# Altium PCB PCB1.PcbDoc
Units mm, origin at the board's own origin, x right, y up, seen from the top; angles counter-clockwise.
Board outline 65 x 56.5 mm, 2 copper layers (Top Layer, Bottom Layer), stack 1.534 mm thick; 29 components, 15 nets, 113 pads, 106 vias.
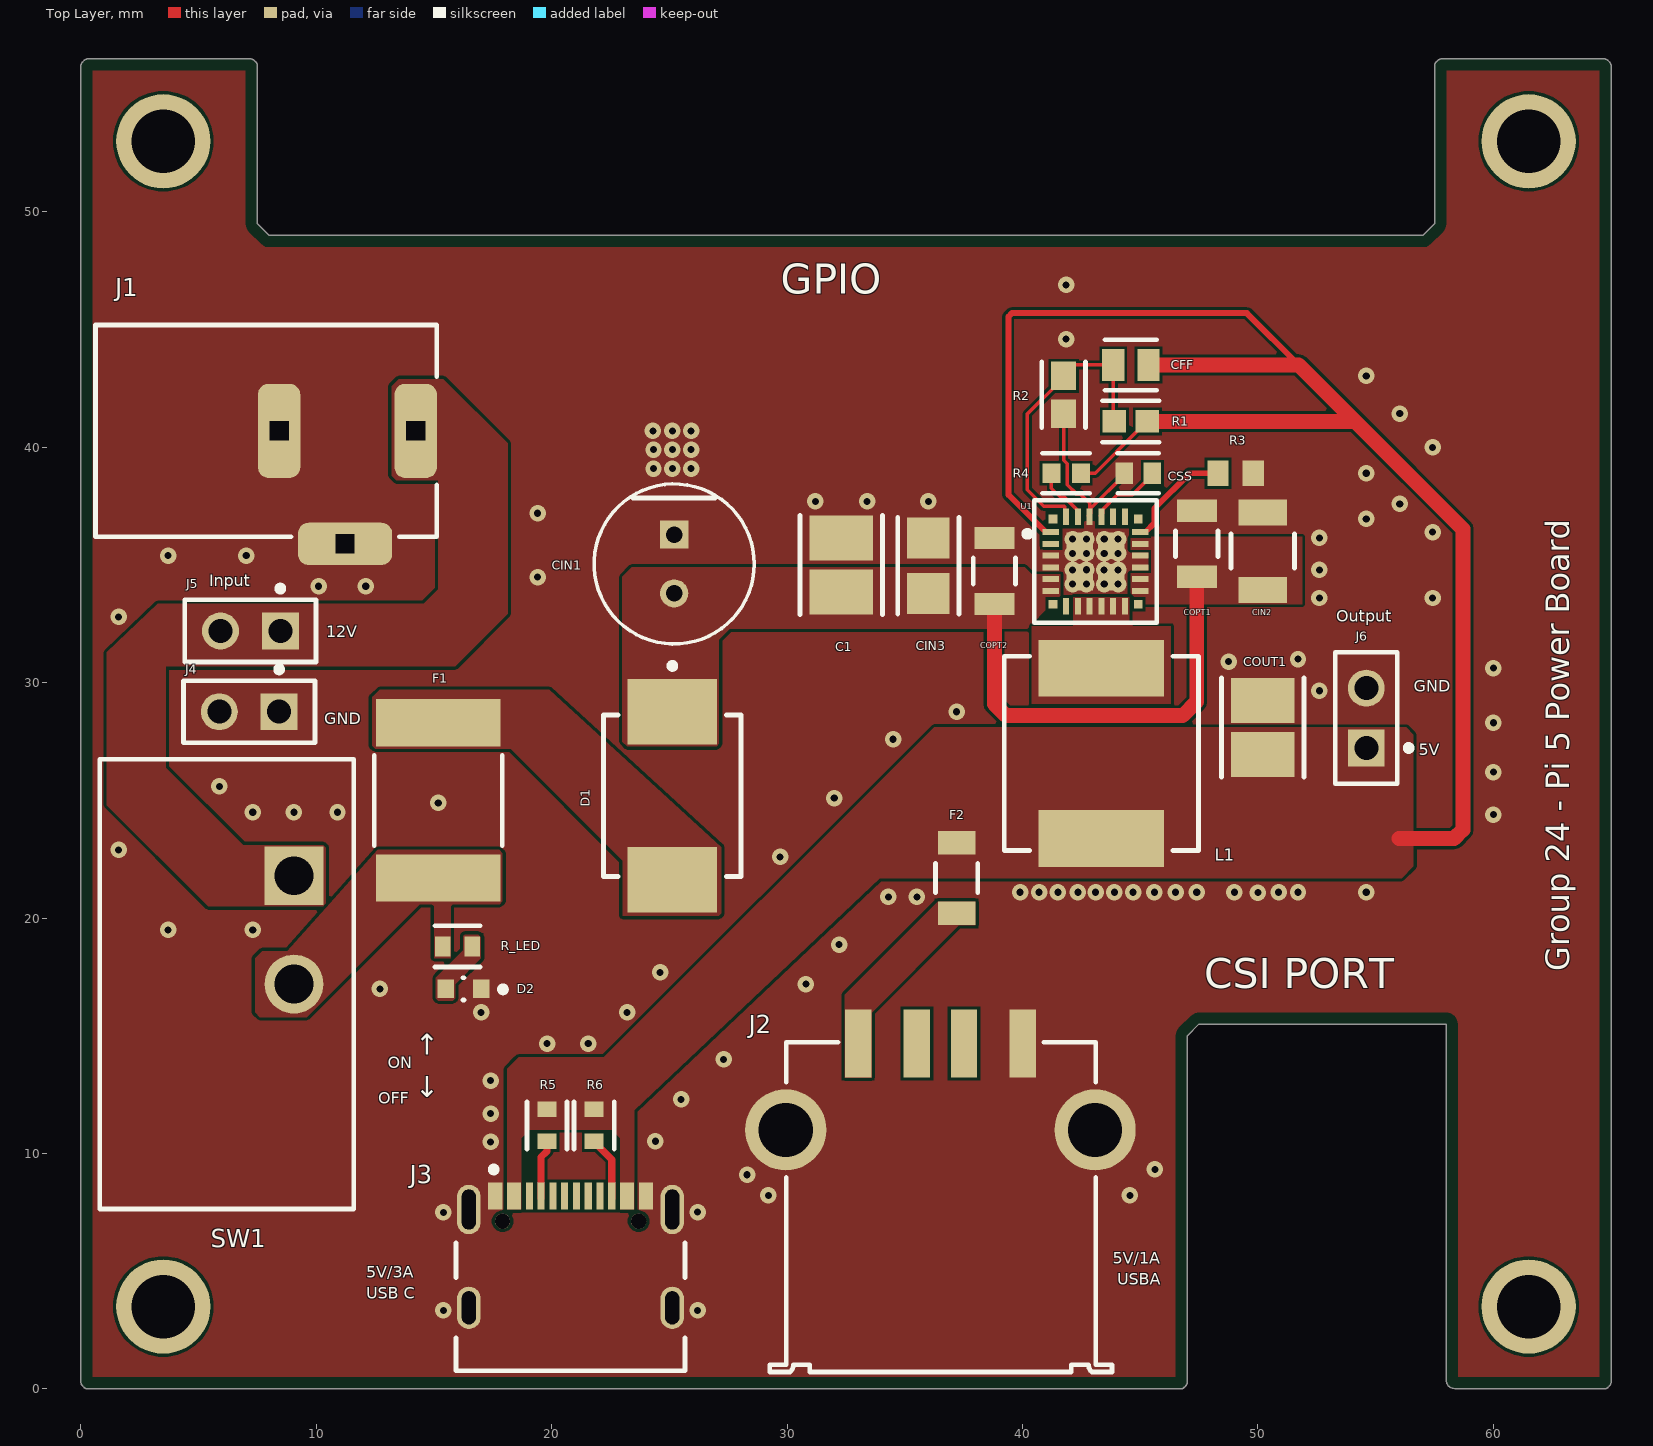
[diagram p0: Top Layer view]
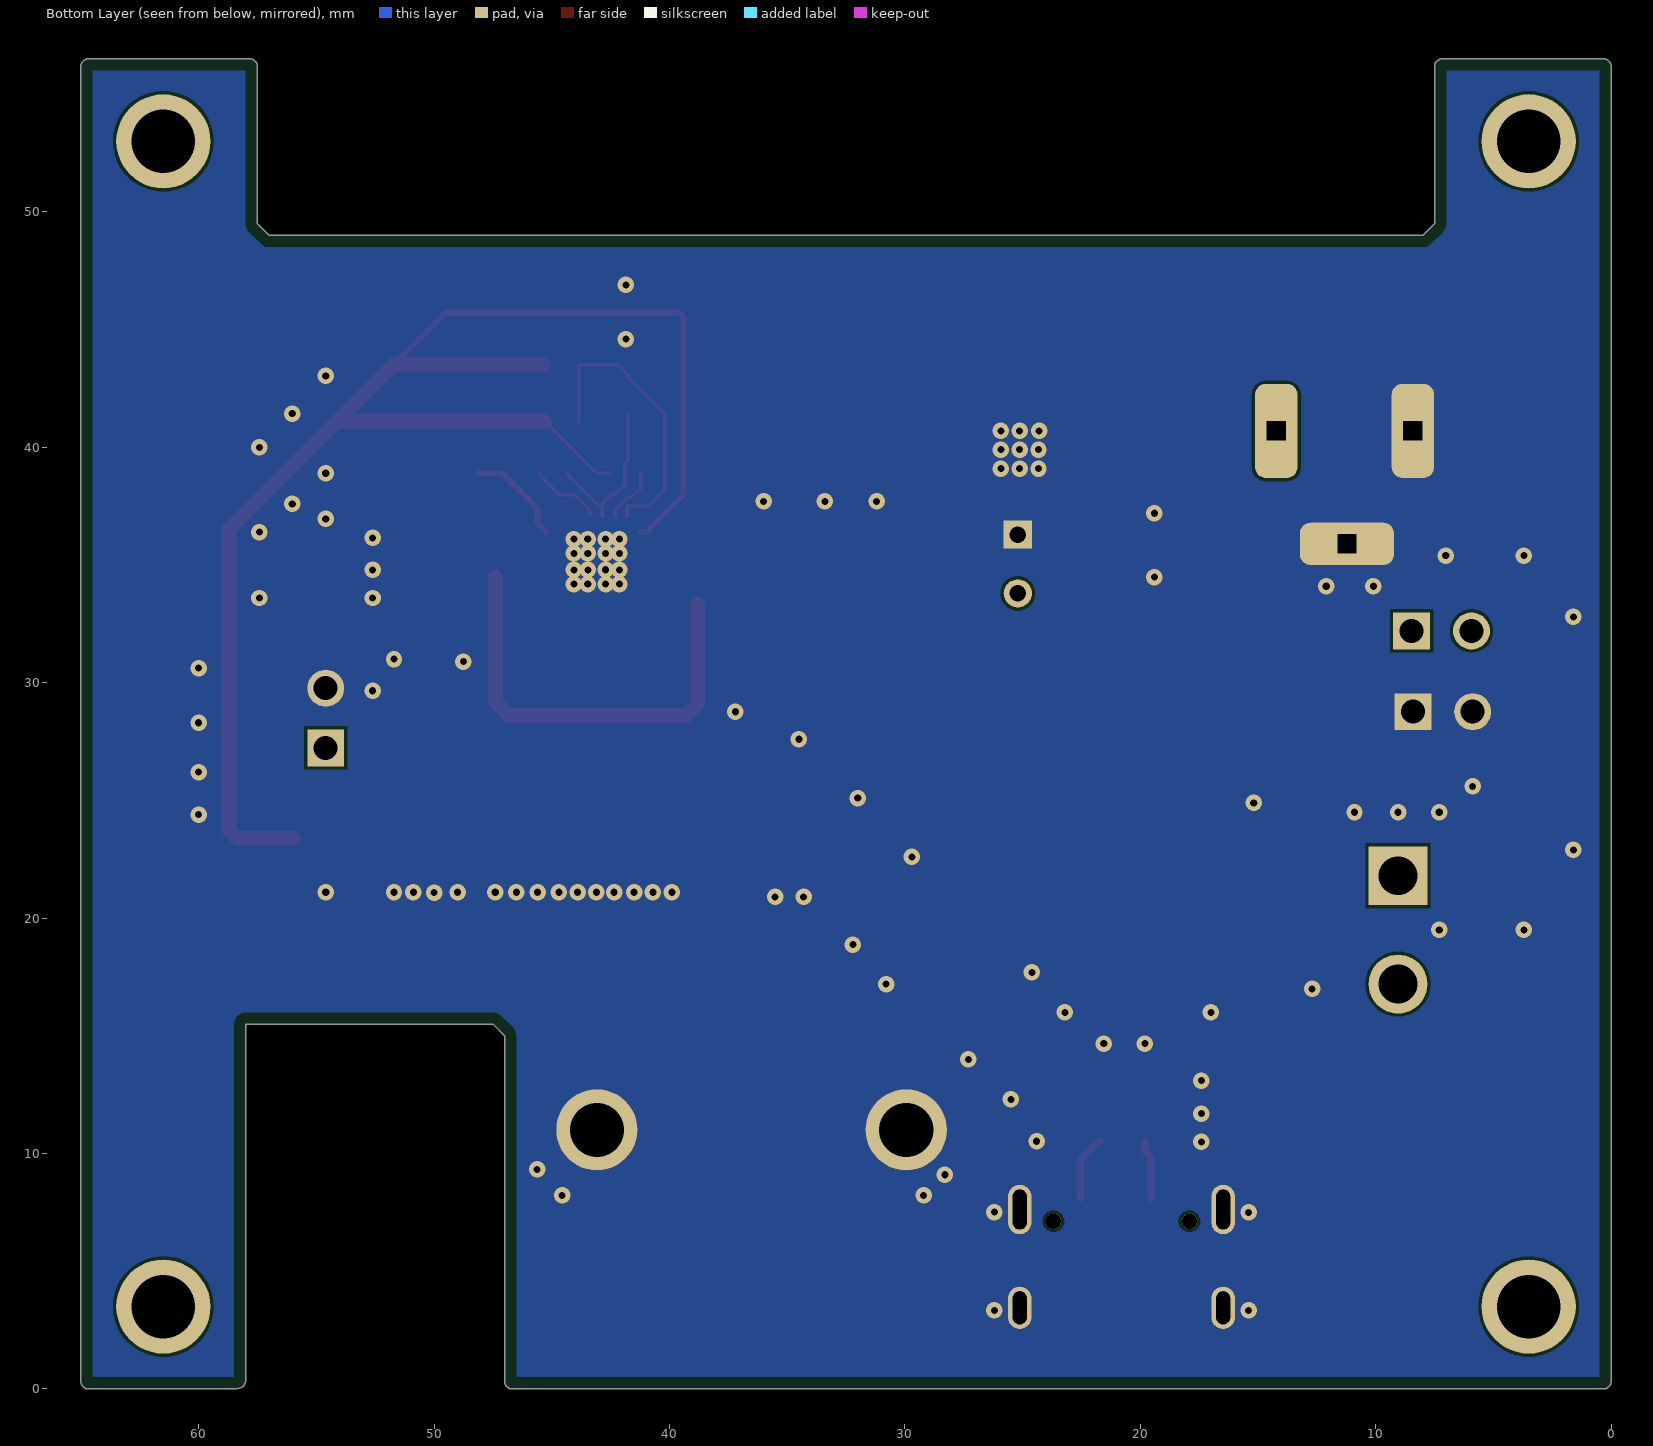
[diagram p1: Bottom Layer view, seen from below]
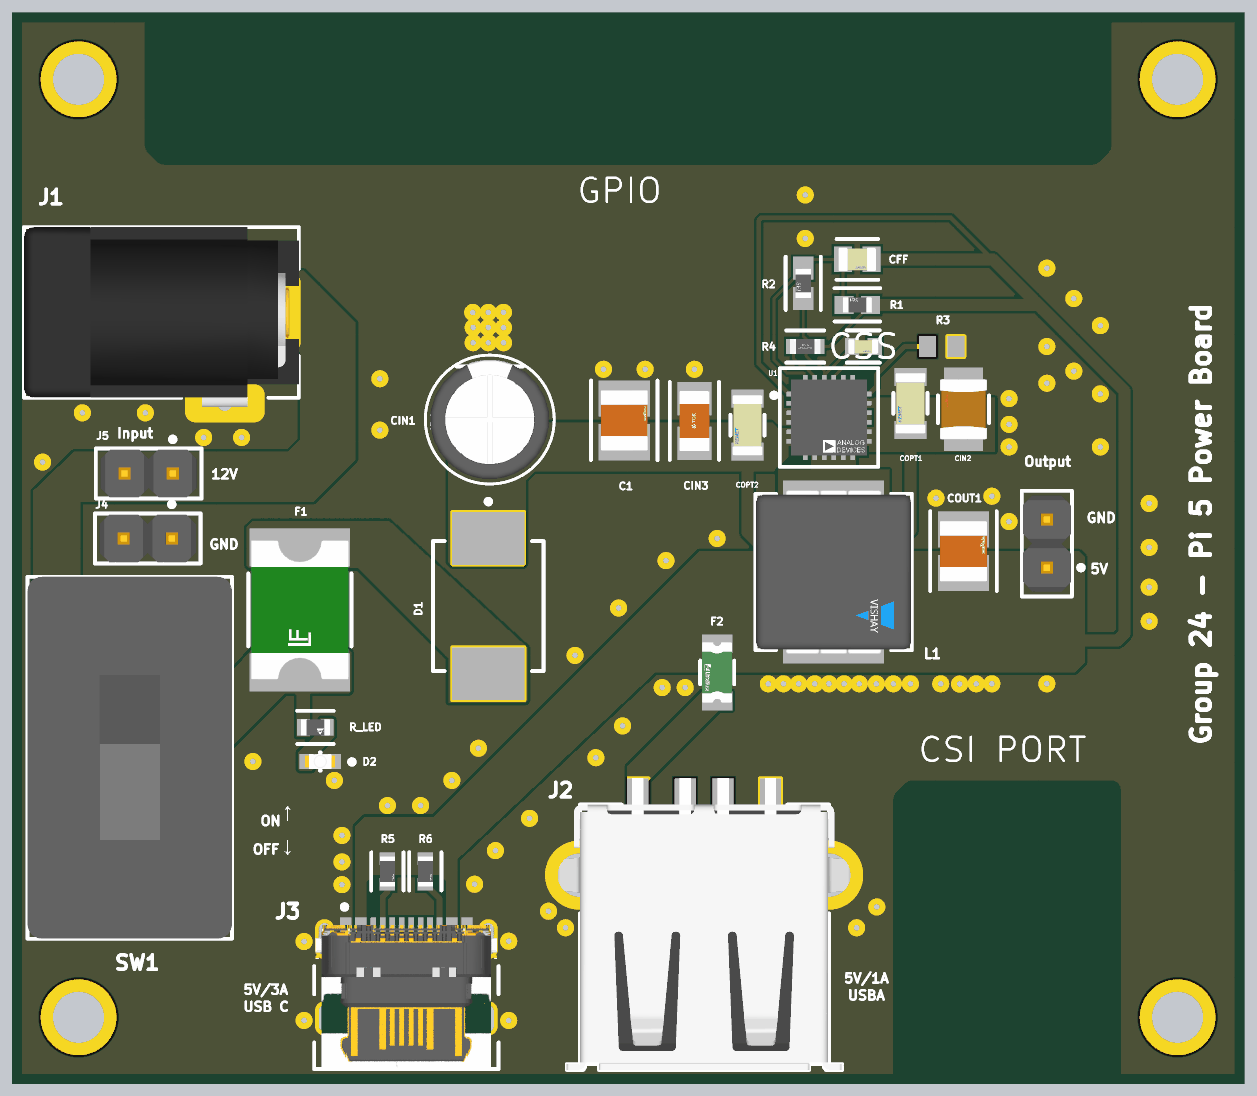
[diagram p2: 3D render of the assembled board from above, using the file's embedded part models]

## Layer stack, top to bottom
Top Solder: solder mask 0.0127, Solder Resist, Dk 3.3
Top Layer: signal copper 0.0178
Dielectric1: core 1.4986, FR-4, Dk 4.3
Bottom Layer: signal copper 0.0178
Bottom Solder: solder mask 0.0127, Solder Resist, Dk 3.3

## Board outline
58.108,0.112 cw(c58.369,0.373) 58,0.373 58,15.5 47.5,15.5 47,15 47,0.3 cw(c46.759,0.3) 46.929,0.129 46.871,0.071 cw(c46.7,0.241) 46.7,0 0.3,0 cw(c0.3,0.241) 0.129,0.071 0.071,0.129 cw(c0.241,0.3) 0,0.3 0,56.2 cw(c0.241,56.2) 0.071,56.371 0.129,56.429 cw(c0.3,56.259) 0.3,56.5 7.2,56.5 cw(c7.2,56.259) 7.371,56.429 7.429,56.371 cw(c7.259,56.2) 7.5,56.2 7.5,49.5 8,49 57,49 57.5,49.5 57.5,56.2 cw(c57.741,56.2) 57.571,56.371 57.629,56.429 cw(c57.8,56.259) 57.8,56.5 64.7,56.5 cw(c64.7,56.26) 64.871,56.429 64.929,56.371 cw(c64.759,56.2) 65,56.2 65,0.3 cw(c64.759,0.3) 64.929,0.129 64.871,0.071 cw(c64.7,0.241) 64.7,0 58.483,0 cw(c58.483,0.683)

## Design rules (kind name [scope] priority, off if disabled: settings)
BoardOutlineClearance [All] p1: gap=0.5 ignorepadtopadclearanceinfootprint=FALSE
Clearance [All] p1: gap=0.127 ignorepadtopadclearanceinfootprint=FALSE except(0.25: Text-Hole)
ComponentClearance [All] p1: gap=0.127 collisioncheckmode=3 verticalgap=0.127 showdistances=TRUE
DiffPairsRouting [All] p1: maxlimit=0.254 minlimit=0.127 mostfreqgap=0.127 toplayer_minwidth=0.127 toplayer_maxwidth=25.4 toplayer_prefwidth=0.127 bottomlayer_minwidth=0.127 bottomlayer_maxwidth=25.4 bottomlayer_prefwidth=0.127 maxuncoupledlength=12.7
Height [All] p1: minheight=0 maxheight=1816.048 prefheight=12.7
HoleSize [All] p1: absolutevalues=TRUE maxlimit=6.3 minlimit=0.3 maxpercent=80.000 minpercent=20.000
HoleToHoleClearance [All] p1: gap=0.2 allowstackedmicrovias=FALSE
MinimumAnnularRing [All] p1: minimumring=0.2
MinimumSolderMaskSliver [All] p1: minsoldermaskwidth=0
PlaneClearance [All] p1: clearance=0.127
PlaneConnect PlaneConnectPowerPads [InPadClass('PowerPads')] p1: planeconnectstyle=Direct reliefexpansion=0.508 reliefentries=4 reliefconductorwidth=0.254 reliefairgap=0.254
PlaneConnect [All] p2: pad.planeconnectstyle=Relief pad.reliefexpansion=0.3 pad.reliefentries=4 pad.reliefconductorwidth=0.127 pad.reliefairgap=0.127 via.planeconnectstyle=Direct via.reliefexpansion=0.3 via.reliefentries=4 via.reliefconductorwidth=0.127 via.reliefairgap=0.127
PolygonConnect PolygonConnectPowerPads [All vs (InPadClass('PowerPads'))] p1: connectstyle=Direct reliefconductorwidth=0.254 reliefentries=4 polygonreliefangle="90 Angle" airgapwidth=0.254
PolygonConnect [All] p2: connectstyle=Direct reliefconductorwidth=0.127 reliefentries=4 polygonreliefangle="90 Angle" airgapwidth=0.127
RoutingVias [All] p1: holewidth=0.3 width=0.6 viastyle="Through Hole" minholewidth=0.3 minwidth=0.6 maxholewidth=0.6 maxwidth=6.6
SilkToSilkClearance [All] p1: silktosilkclearance=0
SilkToSolderMaskClearance [IsPad] p1: minsilkscreentomaskgap=0.127 clearancetoexposedcopper=TRUE
SolderMaskExpansion [All] p1: expansion=0.102 istentingtop=FALSE
SupplyNets "Schematic Supply Nets" [InNet('GND')] p1: voltage=0.000
Width [All] p1: maxlimit=25.4 minlimit=0.127 preferedwidth=0.127 minimp=50.000000 maximp=50.000000 favimp=50.000000
20 further rules are at their usual default settings.

## Components (designator, comment, footprint, x,y, rotation, side; value= is the part's Value field where it differs from the comment)
C1 "4.7uF" FP-GCM32E-0_3-IPC_B 32.3,35 r90 top
CFF "10pF" FP-C0805C-DN-MFG 44.6,43.5 r180 top value="10 pF"
CIN1 "100uF" FP-RAD-TH-D_6_3_0_5-L_11-MFG 25.2,35.045 r270 top
CIN2 "10uF" FP-GRM32-MFG 50.2,35.59 r90 top
CIN3 "1uF" FP-C3216-160-0_2-IPC_B 36,34.972 r90 top
COPT1 "0.1uF" FP-C1206C-EB-MFG 47.4,35.9 r90 top value="0.10 μF"
COPT2 "0.1uF" FP-C1206C-EB-MFG 38.8,34.748 r90 top value="0.10 μF"
COUT1 "100uF" FP-GRM32E-0_3-0_2-IPC_B 50.2,28.1 r90 top
CSS "10nF" FP-C0603C-CF-MFG 44.912,38.9 r180 top value="10,000 pF"
D1 "Schottky Barrier" ONSC-SMC-2-403-03_V 25.123,25.2 r270 top
D2 "GREEN_LED" FP-APHD1608LZGCK-MFG 16.25,17 r180 top
F1 "4A hold" FP-2920L400-15MR-MFG 15.18,25 r90 top
F2 "1.1A hold" FP-NANOSMDC110F-2-MFG 37.2,21.7 r270 top value=0.07-0.2Ω
J1 "Vin_12V" 694108301002 7.87,40.7 r270 top
J2 "USB-A Connector" 62900416021 36.513,7.725 r0 top
J3 "USB-C Connector" FP-USB4105-GF-A-MFG 20.8,4.61 r0 top
J4 "M20-9990245" FP-M20-9990245-MFG 7.15,28.769 r180 top
J5 "M20-9990245" FP-M20-9990245-MFG 7.2,32.2 r180 top
J6 "M20-9990245" FP-M20-9990245-MFG 54.6,28.5 r90 top
L1 "3.3uH" FP-IHLP-3232DZ-FP_2_413x5-MFG 43.347,27 r270 top
R1 "1MΩ" FP-RMCF0603-IPC_B 44.6,41.1 r180 top
R2 "243kΩ" FP-RMCF0603-IPC_A 41.744,42.234 r270 top
R3 "41.2kΩ" RESC1608X55X30ML20T10 49.05,38.9 r180 top
R4 "100kΩ" FP-CRGP0603-IPC_C 41.85,38.9 r0 top value=100KΩ
R5 "10kΩ" FP-RC0603-0_55-IPC_C 19.8,11.2 r270 top
R6 "10kΩ" FP-RC0603-0_55-IPC_C 21.8,11.2 r270 top
R_LED "4.7kΩ" FP-MCT0603-IPC_C 16,18.8 r0 top
SW1 "Power Switch" FP-L101011MS02Q-MFG 6.2,17.2 r180 top
U1 "LT8640SIV#PBF" FP-LQFN-24-05-08-1511-MFG 43.1,35.15 r0 top

## Footprints (in the part's own frame and the unit in brackets; to place one, negate y for a bottom-side part, rotate by r counter-clockwise, add the part's x,y. Pads: shape width x height; smd on the part's side, far side on the other; paste and mask are expansions set on the pad)
62900416021 [mm] "USB 2.0 SMT Type A Horizontal"
  rect 1.12x2.88 smd: 1(-3.5,6.95) 2(-1,6.95) 3(1,6.95) 4(3.5,6.95)
  round 3.45 hole 2.3: Shell(-6.57,3.28) Shell(6.57,3.28)
  silkscreen extent -7.25,-7 7.29,7, body extent -7.81,-7 7.81,8.41, height 7.81
694108301002 [mm] "DC Power Jack Right Angled(6.4)"
  rrect50% 4x1.8 hole 0.8 square: 1(0,6.35) 2(0,0.55)
  rrect50% 1.8x4 hole 0.8 square: 3(4.8,3.35)
  silkscreen extent -4.5,-7.25 4.5,7.25, body extent -4.5,-7.25 5,7.25, height 10.75
FP-2920L400-15MR-MFG [mm]
  rect 2x5.3 smd paste+0 mask+0: 1(-3.3,0) 2(3.3,0)
  silkscreen extent -1.92,-2.72 1.93,2.72, body extent -4.4,-2.82 4.4,2.82, height 0.25
FP-APHD1608LZGCK-MFG [mm]
  rect 0.7x0.8 smd paste+0 mask+0: 1(-0.75,0) 2(0.75,0)
  silkscreen extent -1.8,-0.47 0.02,0.48, body extent -1.2,-0.58 1.2,0.58, height 0.25
FP-C0603C-CF-MFG [mm]
  rect 0.75x0.9 smd paste+0 mask+0: 1(-0.6,0) 2(0.6,0)
  silkscreen extent -0.87,-0.85 0.88,0.85, body extent -1.2,-0.6 1.2,0.6, height 0.25
FP-C0805C-DN-MFG [mm]
  rect 0.95x1.35 smd paste+0 mask+0: 1(-0.75,0) 2(0.75,0)
  silkscreen extent -1.1,-1.08 1.1,1.08, body extent -1.4,-0.85 1.4,0.85, height 0.25
FP-C1206C-EB-MFG [mm]
  rect 0.95x1.7 smd paste+0 mask+0: 1(-1.4,0) 2(1.4,0)
  silkscreen extent -0.55,-0.9 0.55,0.9, body extent -2,-1 2,1, height 0.25
FP-C3216-160-0_2-IPC_B [mm]
  rect 1.754x1.806 smd paste+0 mask+0: 1(-1.176,0) 2(1.176,0)
  silkscreen extent -2.05,-1.3 2.05,1.3, body extent -2.3,-1.15 2.3,1.15, height 0.25
FP-CRGP0603-IPC_C [mm]
  rect 0.758x0.812 smd paste+0 mask+0: 1(-0.627,0) 2(0.627,0)
  silkscreen extent -1.01,-0.85 1.01,0.85, body extent -1.11,-0.55 1.11,0.55, height 0.25
FP-GCM32E-0_3-IPC_B [mm]
  rect 1.903x2.706 smd paste+0 mask+0: 1(-1.151,0) 2(1.151,0)
  silkscreen extent -2.1,-1.75 2.1,1.75, body extent -2.35,-1.6 2.35,1.6, height 0.25
FP-GRM32-MFG [mm]
  rect 1.1x2.05 smd paste+0 mask+0: 1(-1.65,0) 2(1.65,0)
  silkscreen extent -0.73,-1.35 0.73,1.35, body extent -2.3,-1.45 2.3,1.45, height 0.25
FP-GRM32E-0_3-0_2-IPC_B [mm]
  rect 1.903x2.706 smd paste+0 mask+0: 1(-1.151,0) 2(1.151,0)
  silkscreen extent -2.1,-1.75 2.1,1.75, body extent -2.35,-1.6 2.35,1.6, height 0.25
FP-IHLP-3232DZ-FP_2_413x5-MFG [mil]
  rect 95x210 smd paste+0 mask+0: 1(-142.5,0) 2(142.5,0)
  silkscreen extent -163,-163 163,163, body extent -194,-166 194,166, height 10
FP-L101011MS02Q-MFG [mm]
  rect 2.5x2.5 hole 1.65 paste-2539.97 mask+0: 1(-2.85,-4.6)
  round 2.5 hole 1.65 paste-2539.97 mask+0: 2(-2.85,0)
  silkscreen extent -5.39,-9.55 5.39,9.55, body extent -5.5,-9.65 5.5,9.65, height 0.25
FP-LQFN-24-05-08-1511-MFG [mm]
  rect 0.7x0.25 smd paste+0 mask+0: 1(-1.9,1.25) 2(-1.9,0.75) 3(-1.9,0.25) 4(-1.9,-0.25) 5(-1.9,-0.75) 6(-1.9,-1.25) 13(1.9,-1.25) 14(1.9,-0.75) 15(1.9,-0.25) 16(1.9,0.25) 17(1.9,0.75) 18(1.9,1.25)
  rect 0.25x0.7 smd paste+0 mask+0: 7(-1.25,-1.9) 8(-0.75,-1.9) 9(-0.25,-1.9) 10(0.25,-1.9) 11(0.75,-1.9) 12(1.25,-1.9) 19(1.25,1.9) 20(0.75,1.9) 21(0.25,1.9) 22(-0.25,1.9) 23(-0.75,1.9) 24(-1.25,1.9)
  rect 1.125x1.125 smd paste+0 mask+0: 25(-0.662,0.663) 26(0.662,0.663) 27(-0.662,-0.663) 28(0.662,-0.663)
  rect 0.375x0.375 smd paste+0 mask+0: 29(-1.812,1.813) 30(1.812,1.813) 31(-1.812,-1.813) 32(1.812,-1.813)
  silkscreen extent -3.02,-2.6 2.6,2.6, body extent -2.35,-2.35 2.35,2.35, height 0.25
FP-M20-9990245-MFG [mm]
  rect 1.57x1.57 hole 1.02 paste-2539.97 mask+0: 1(-1.27,0)
  round 1.57 hole 1.02 paste-2539.97 mask+0: 2(1.27,0)
  silkscreen extent -2.79,-1.92 2.79,1.32, body extent -2.89,-1.42 2.89,1.42, height 0.25
FP-MCT0603-IPC_C [mm]
  rect 0.664x0.862 smd paste+0 mask+0: 1(-0.629,0) 2(0.629,0)
  silkscreen extent -0.96,-0.88 0.96,0.87, body extent -1.06,-0.58 1.06,0.58, height 0.25
FP-NANOSMDC110F-2-MFG [mm]
  rect 1x1.6 smd paste+0 mask+0: 1(-1.5,0) 2(1.5,0)
  silkscreen extent -0.62,-0.9 0.63,0.9, body extent -2.1,-1 2.1,1, height 0.25
FP-RAD-TH-D_6_3_0_5-L_11-MFG [mm]
  rect 1.2x1.2 hole 0.7 paste-2539.97 mask+0: 1(-1.25,0)
  round 1.2 hole 0.7 paste-2539.97 mask+0: 2(1.25,0)
  silkscreen extent -3.4,-3.4 3.4,3.4, body extent -3.5,-3.5 3.5,3.5, height 0.25
FP-RC0603-0_55-IPC_C [mm]
  rect 0.659x0.812 smd paste+0 mask+0: 1(-0.677,0) 2(0.677,0)
  silkscreen extent -1.01,-0.85 1.01,0.85, body extent -1.11,-0.55 1.11,0.55, height 0.25
FP-RMCF0603-IPC_A [mm]
  rect 1.206x1.058 smd paste+0 mask+0: 1(-0.801,0) 2(0.801,0)
  silkscreen extent -1.4,-0.93 1.4,0.93, body extent -1.9,-1.03 1.9,1.03, height 0.25
FP-RMCF0603-IPC_B [mm]
  rect 1.006x0.958 smd paste+0 mask+0: 1(-0.701,0) 2(0.701,0)
  silkscreen extent -1.2,-0.88 1.2,0.88, body extent -1.45,-0.73 1.45,0.73, height 0.25
FP-USB4105-GF-A-MFG [mm]
  rrect100% 1x2.1 hole 1.7 slot 0.6 at 0 deg paste-2539.97 mask+0: 1(-4.32,3.015) 2(4.32,3.015)
  rrect100% 1x1.8 hole 1.4 slot 0.6 at 0 deg paste-2539.97 mask+0: 3(-4.32,-1.165) 4(4.32,-1.165)
  rect 0.6x1.15 smd paste+0 mask+0: A1-B12(-3.2,3.59) A4-B9(-2.4,3.59) B1-A12(3.2,3.59) B4-A9(2.4,3.59)
  rect 0.3x1.15 smd paste+0 mask+0: A5(-1.25,3.59) A6(-0.25,3.59) A7(0.25,3.59) A8(1.25,3.59) B5(1.75,3.59) B6(0.75,3.59) B7(-0.75,3.59) B8(-1.75,3.59)
  round 0.65 hole 0.65 unplated paste-2539.97 mask+0: ""(-2.89,2.515) ""(2.89,2.515)
  silkscreen extent -4.86,-3.84 4.86,4.84, body extent -4.96,-3.94 4.96,4.27, height 0.25
ONSC-SMC-2-403-03_V [mil] "Molded, 2-Leads, Body 6.86x5.84mm"
  rect 110x150 smd: 1(-140.49,0) 2(140.49,0)
  silkscreen extent -222,-115 135,115, body extent -135,-115 135,115, height 99
RESC1608X55X30ML20T10 [mm] "Chip Resistor, 2-Leads, Body 1.60x0.80mm, IPC Low Density"
  rect 0.9x1.1 smd: 1(-0.75,0) 2(0.75,0)
  body extent -0.9,-0.5 0.9,0.5, height 0.55

## Part data
C1: library part CMP-06035-005584-1, "Ceramic Capacitor for Automotive 4.7uF ±10% 50VDC X7R 1210 Embossed T/R", Case Code (Imperial)=1210, Case Code (Metric)=3225, Dielectric=X7R, Max Operating Temperature=125°C, Min Operating Temperature=-55°C, Package Quantity=1, Ratings=AEC-Q200, Tolerance=20%, Voltage=50V, Capacitance=4.7uF, Case/Package=1210, Depth=2.5mm, Height=2.5mm, Lead Free="Lead Free", Length=3.2mm, Mount="Surface Mount", Packaging="Tape and Reel", Radiation Hardening=No, Termination=SMD/SMT, Thickness=0.106inch, Voltage Rating=50V, Voltage Rating (DC)=50V, Width=0.098inch
CFF: library part CMP-03020-028919-1, "C0805 10 pF C0G 30ppm/°C 5.00% 250 V", Capacitance="10 pF", Manufacturer=KEMET, Manufacturer Part Number=C0805C100JAGACTU, Package=C0805C-DN, Temperature="-55°C to +125°C", Temperature Characteristic=C0G, Temperature Coefficient=30ppm/°C, Temperature Range High=+125°C, Temperature Range Low=-55°C, Tolerance=0.05, Voltage Rating="250 V", Automotive=No, Category=Cap, ComponentLink2Description=Datasheet, ComponentLink2URL=https://content.kemet.com/datasheets/KEM_C1003_C0G_SMD.pdf, Device Class L1="Passive Components", Device Class L2=Capacitors, Device Class L3="Ceramic Capacitors", Height=0.88mm, Ipc Land Pattern Name=CAPC200125X78, Lead Free=Yes, Material=Ceramic, Octopart=https://octopart.com/c0805c100jagactu-kemet-88373098, RoHS=TRUE
CIN1: library part CMP-05427-000856-1, "Aluminum Electrolytic Capacitors (Radial Lead Type) 100uF ±20% 25V", Case/Package=Radial, ESR (Equivalent Series Resistance)=130mR, Max Operating Temperature=105°C, Min Operating Temperature=-40°C, Package Quantity=2000, Ripple Current=455mA, Tolerance=20%, Voltage Rating=25V, Capacitance=100uF, Diameter=6mm, Height - Seated (Max)=0.5inch, Impedance=130mR, Lead Diameter=0.5mm, Lead Pitch=5mm, Length=11mm, Life (Hours)=2000Hour, Mount="Through Hole", Packaging="Tape and Reel", Polarity=Polar, RoHS Compliant=Yes, Series=FM, Termination=Radial, Voltage Rating (DC)=25V
CIN2: library part CMP-2000-05261-2, "CAP CER 10UF 50V X7R 1210", Manufacturer=Murata, Manufacturer Part Number=GRM32ER71H106KA12L, Package=GRM32, Temperature="-55°C to +125°C", Temperature Characteristic=X7R, Temperature Coefficient=15%, Temperature Range High=+125°C, Temperature Range Low=-55°C, Tolerance=10%, Voltage Rating=50V, Automotive=No, Capacitance=10uF, Category=Cap, ComponentLink2Description=Datasheet, ComponentLink2URL=https://search.murata.co.jp/Ceramy/image/img/A01X/G101/ENG/GRM32ER71H106KA12-01.pdf, Device Class L1="Passive Components", Device Class L2=Capacitors, Device Class L3="Ceramic Capacitors", Digikey Description="CAP CER 10UF 50V X7R 1210", Height=2.7mm, Lead Free=Yes, Material=Ceramic, Mouser Description="1210 10 uF 50 V ±10% Tolerance X7R SMT Multilayer Ceramic Capacitor", Octopart=https://octopart.com/grm32er71h106ka12l-murata-10470987, RoHS=TRUE
CIN3: library part CMP-2000-05402-2, "Multilayer Ceramic Capacitors 1uF ±10% 50V X7R SMD 1206", Case Code (Imperial)=1206, Case Code (Metric)=3216, Dielectric=X7R, Dielectric Material=Ceramic, Max Operating Temperature=125°C, Min Operating Temperature=-55°C, Package Quantity=2000, Tolerance=10%, Voltage=25V, Voltage Rating=50V, Capacitance=1uF, Case/Package=1206, Depth=1.6mm, Height=1.6mm, Lead Free="Lead Free", Length=0.126inch, Mount="Surface Mount", Number of Pins=2, Packaging="Tape and Reel", Radiation Hardening=No, REACH SVHC="No SVHC", Resistor Type=Ceramic, RoHS Compliant=Yes, Series=C, Termination=SMD/SMT, Thickness=0.071inch, Voltage Rating (DC)=50V, Weight=0.000571oz, Width=0.063inch
COPT1 COPT2: library part CMP-1037-04228-2, "CAP CER 0.1UF 250V X7R 1206", Capacitance="0.10 μF", Manufacturer=KEMET, Manufacturer Part Number=C1206C104JARACTU, Package=C1206C-EB, Temperature="-55°C to +150°C", Temperature Characteristic=X7R, Temperature Coefficient=15%, Temperature Range High=+150°C, Temperature Range Low=-55°C, Tolerance=0.05, Voltage Rating="250 V", Automotive=Yes, Automotive Grade="Grade 0", Category=Cap, ComponentLink2Description=Datasheet, ComponentLink2URL=https://content.kemet.com/datasheets/KEM_C1007_X8R_ULTRA_150C_SMD.pdf, Device Class L1="Passive Components", Device Class L2=Capacitors, Device Class L3="Ceramic Capacitors", Digikey Description="CAP CER 0.1UF 250V X7R 1206", Height=0.88mm, Ipc Land Pattern Name=CAPC320160X78, Lead Free=Yes, Material=Ceramic, Octopart=https://octopart.com/c1206c104jaractu-kemet-16430893, RoHS=TRUE
COUT1: library part CMP-06035-040230-1, "Chip Multilayer Ceramic Capacitors for General Purpose, 1210, 100uF, X5R, 15%, 20%, 10V", Case Code (Imperial)=1210, Case Code (Metric)=3225, Dielectric=X5R, Max Operating Temperature=85°C, Min Operating Temperature=-55°C, Package Quantity=4000, Tolerance=20%, Voltage Rating=10V, Capacitance=100uF, Case/Package=1210, Length=0.126inch, Mount="Surface Mount", Packaging="Tape and Reel", Termination=SMD/SMT, Thickness=0.106inch, Voltage Rating (DC)=10V, Weight=0.00388oz, Width=0.098inch
CSS: library part CMP-03020-015732-1, "C0603 10,000 pF X7R 30ppm/°C 10.00% 25 V", Capacitance="10,000 pF", Manufacturer=KEMET, Manufacturer Part Number=C0603C103K3RAC7411, Package=C0603C-CF, Temperature="-55°C to +125°C", Temperature Characteristic=X7R, Temperature Coefficient=30ppm/°C, Temperature Range High=+125°C, Temperature Range Low=-55°C, Tolerance=0.1, Voltage Rating="25 V", Automotive=Yes, Automotive Grade="Grade 1", Category=Cap, ComponentLink2Description=Datasheet, ComponentLink2URL=https://api.kemet.com/component-edge/download/datasheet/C0603C100J5GACAUTO.pdf, Device Class L1="Passive Components", Device Class L2=Capacitors, Device Class L3="Ceramic Capacitors", Height=0.87mm, Lead Free=Yes, Material=Ceramic, Mouser Description="Cap Ceramic 0.01uF 25V X7R 10% SMD 0603 125°C Paper T/R", Octopart=https://octopart.com/c0603c103k3rac7411-kemet-55455931, RoHS=TRUE
D1: library part CMP-1055-00390-1, "Schottky Power Rectifier, 2-Pin SMC, Pb-Free, Tape and Reel", Manufacturer="On Semiconductor", PartNumber=MBRS540T3G, ComponentLink1Description="Manufacturer URL", ComponentLink1URL=http://www.onsemi.com/, ComponentLink2Description=Datasheet, ComponentLink2URL=http://www.onsemi.cn/pub_link/Collateral/MBRS540T3-D.PDF, ComponentLink3Description="Package Specification", ComponentLink3URL=http://www.onsemi.com/pub_link/Collateral/403-03.PDF, Configuration=Single, DatasheetVersion="Rev. 8", IFSM Max (A)=190, Mounting Technology="Surface Mount", PackageDescription="2-Pin Small Molded Package, J-Bend Lead, Body 5.845 x 6.855 mm", PackageReference=SMC-2-403-03, PackageVersion="Rev. E, 08/2005", Packing="Tape and Reel", RoHS=TRUE
D2: library part CMP-44529-000045-1, "LED GREEN CLEAR 1608 SMD", Case Code (Imperial)=0603, Case Code (Metric)=1608, Color=Green, Forward Voltage=2.65V, Lens Color=Colorless, Test Current=2mA, Case/Package=0603, Dominant Wavelength=525nm, Height=0.75mm, Length=1.6mm, Lens Size=0.7mm, Lens Style=Round, Lens Transparency=Clear, Luminous Intensity=180mcd, Mount="Surface Mount", Packaging="Tape and Reel", Viewing Angle=100°, Width=0.8mm
F1: library part CMP-08606-000010-2, "PTC RESET FUSE 15V 4A 2920", Case Code (Imperial)=2920, Case Code (Metric)=7351, Hold Current=4A, Max Current Rating=40A, Max Operating Temperature=85°C, Min Operating Temperature=-40°C, Trip Current=8A, Approvals=TUV, Mount="Surface Mount", Packaging="Tape and Reel", Time to Trip=4s
F2: library part CMP-08606-000043-1, "PTC RESET FUSE 6V 1.1A 1206", Ambient Temperature Range High=+85°C, Ambient Temperature Range Low=-40°C, Current Rating=100A, Hold Current=1.1A, Manufacturer=Littelfuse, Manufacturer Part Number=NANOSMDC110F-2, Package=0, Resistance=0.07-0.2Ω, Temperature="to +85°C", Trip Current=2.2A, Voltage Rating=6V, Automotive=No, Category=Fuse, ComponentLink2Description=Datasheet, ComponentLink2URL=https://www.littelfuse.com/~/media/electronics/datasheets/resettable_ptcs/littelfuse_ptc_nanosmdc_datasheet.pdf.pdf, Device Class L1="Circuit Protection", Device Class L2="PTC Resettable Fuses", Device Class L3=unset, Digikey Description="PTC RESET FUSE 6V 1.1A 1206", Height=0.67mm, Lead Free=Yes, Octopart=https://octopart.com/nanosmdc110f-2-littelfuse-74215055, RoHS=TRUE, Temperature Range High=+85°C, Trip Time=0.1s
J1: library part CMP-1502-00190-4, "DC Power Jack Connector WR-DC, Male, Right Angled, THT, 5 A, 24 V", Color=Black, Current Rating=5A, Flammability Rating="UL94 V-0", Insulation Resistance=100MΩ, Max Operating Temperature=85°C, Min Operating Temperature=-40°C, Operating Supply Voltage=24V, Voltage Rating=30V, Connector Type=Power, Contact Gender=Female, Contact Material="Gold, Tin", Contact Plating=Tin, Gender=Male, Height=11mm, Housing Material=Polyamide, Mount="Through Hole", Number of Contacts=3, Packaging=Bulk, REACH SVHC=Unknown, RoHS=Compliant, Shielding=Unshielded, Termination="Through Hole"
J2: library part CMP-1502-03240-3, "Wr-com; Right Angle Version 2.0; Connector SMT Socket, 30 V AC, 1.5A, 62900", Contact Resistance=20mΩ, Current Rating=1.5A, Insulation Resistance=1GΩ, Max Operating Temperature=105°C, Min Operating Temperature=-40°C, Operating Supply Voltage=30V, Connector Type=USB, Contact Plating=Gold, Features=Shielded, Gender=Receptacle, Lead Free="Lead Free", Length=14.4mm, Mount="Horizontal, Surface Mount", Number of Contacts=4, Number of Pins=4, Orientation=Horizontal, Packaging="Cut Tape", REACH SVHC=Unknown, RoHS=Compliant, Termination=SMD/SMT, USB Standard="USB 2.0"
J3: library part CMP-245163-000001-1, "CONN RCPT USB2.0 TYPEC 5A", Current Rating=5/6.25/1.25/0.25A, Manufacturer=GCT, Manufacturer Part Number=USB4105-GF-A, Package=0, Temperature="-40°C to +85°C", Temperature Range High=+85°C, Temperature Range Low=-40°C, Voltage Rating=20V, Automotive=No, Category=Conn, ComponentLink2Description=Datasheet, ComponentLink2URL=https://gct.co/files/drawings/usb4105.pdf, Conn Orientation="Right Angle", Contact Material=Gold,Nickel, Device Class L1=Connectors, Device Class L2="USB Connectors", Device Class L3=unset, Digikey Description="CONN RCPT USB2.0 TYPEC 5A", Height=3.46mm, Is Female=yes, Lead Free=Yes, Number of Contacts=16, Octopart=https://octopart.com/usb4105-gf-a-gct-106627878, RoHS=TRUE, USB Standard="USB 2.0"
J4 J5 J6: library part CMP-15831-000105-1, "CONN HEADER VERT 2POS 2.54MM", Case/Package=SIL, Color=Black, Contact Resistance=25mR, Current=3A, Flammability Rating="UL94 V-0", Insulation Resistance=10GR, Max Operating Temperature=105°C, Min Operating Temperature=-40°C, Package Quantity=1000, Voltage=50V, Voltage Rating (AC)=750V, Connector Type="Male Pin", Contact Finish - Mating=GOLD, Contact Material=Brass, Contact Mating Length=0.24inch, Contact Plating=Gold, Contact Shape=Square, Contact Type="Male Pin", Current Rating=3A, Depth=2.54mm, Fastening Type=Pull, Gender=Male, Height=0.12inch, Housing Color=Black, Housing Material=Nylon, Insulation Color=Black, Insulation Material=Nylon, Lead Pitch=2.54mm, Length=5.08mm, Mated Stacking Heights=16.54mm, Mating Cycles=300, Max Current Rating=3A, Mount="Through Hole", Number of Contacts=2, Number of Poles=2, Number of Positions=2, Number of Rows=1, Orientation=Straight, Packaging=Bulk, Pitch=2.54mm, Radiation Hardening=No, Reach SVHC Compliant=Yes, Series=M20, Termination=Solder, Weight=0.25lb, Width=0.25inch, Working Voltage=750V
L1: library part CMP-02424-000510-1, "Commercial Inductors, Low DCR Series 3.3uH 10.5A 14.9mΩ 20%", Case/Package=3232, Current Rating=10.5A, DC Resistance (DCR)=14.9mR, Inductance Tolerance=20%, Max DC Current=9.7A, Max Operating Temperature=125°C, Min Operating Temperature=-55°C, Package Quantity=500, Self Resonant Frequency=22MHz, Test Frequency=100kHz, Contact Plating=Tin, Core Material=Ferrite, Depth=8.94mm, Height=4mm, Height - Seated (Max)=0.157inch, Inductance=3.3uH, Lead Free="Lead Free", Length=8.89mm, Military Standard=Not, Mount="Surface Mount", Number of Pins=2, Packaging="Tape and Reel", Radiation Hardening=No, RMS Current (Irms)=10.5A, Saturation Current=9.7A, Shielding=Shielded, Termination=SMD/SMT, Tolerance=20%, Width=8.18mm
R1: library part CMP-26527-006958-1, "1MΩ ±1% 0.1W 0603 Thick Film Chip Resistor AEC-Q200 compliant", Case Code (Imperial)=0603, Case Code (Metric)=1608, Max Operating Temperature=155°C, Max Power Dissipation=100mW, Min Operating Temperature=-55°C, Resistance=1MR, Resistor Type="Thick Film", Temperature Coefficient=100ppm/°C, Tolerance=1%, Working Voltage=75V, Case/Package=0603, Construction=Rectangular, Contact Plating=Tin, Depth=0.8mm, Features="Automotive AEC-Q200", Height=0.022inch, Lead Free="Lead Free", Length=1.55mm, Military Standard=Not, Mount="Surface Mount", Number of Terminations=2, Packaging="Tape and Reel", Power Rating=100mW, Radiation Hardening=No, RoHS Compliant=Yes, Series=RMCF, Technology="THICK FILM", Width=0.031inch
R2: library part CMP-26527-004519-1, "243kΩ ±1% 0.1W 0603 Thick Film Chip Resistor AEC-Q200 compliant", Case Code (Imperial)=0603, Case Code (Metric)=1608, Max Operating Temperature=155°C, Max Power Dissipation=100mW, Min Operating Temperature=-55°C, Package Quantity=1, Resistance=243kR, Resistor Type="Thick Film", Temperature Coefficient=100ppm/°C, Tolerance=1%, Case/Package=0603, Contact Plating=Tin, Features="Automotive AEC-Q200", Height=0.022inch, Length=0.061inch, Mount="Surface Mount", Number of Terminations=2, Packaging="Tape and Reel", Radiation Hardening=No, RoHS Compliant=Yes, Series=RMCF, Width=0.031inch
R3: library part CMP-2000-01491-1, Manufacturer="KOA Speer", Part Number=RK73H1JTTD4122F
R4: library part CMP-03211-000885-1, "CRGP 0603 100K 1%", Ambient Temperature Range High=+70°C, Manufacturer=TE, Manufacturer Part Number=CRGP0603F100K, Package=CRGP0603, Power Rating=0.25W, Resistance=100KΩ, Temperature="-55°C to +155°C", Temperature Coefficient=±100ppm/°C, Temperature Range High=+155°C, Temperature Range Low=-55°C, Tolerance=0.01, Voltage Rating=50V, Automotive=No, Category=Res, ComponentLink2Description=Datasheet, ComponentLink2URL=https://www.te.com/commerce/DocumentDelivery/DDEController?Action=srchrtrv&DocNm=9-1773463-9&DocType=DS&DocLang=English, Composition="Thick Film", Device Class L1="Passive Components", Device Class L2=Resistors, Device Class L3="Chip SMD Resistors", Digikey Description="CRGP 0603 100K 1%", Height=0.55mm, Ipc Land Pattern Name=RESC16080X45, Lead Free=Yes, Octopart=https://octopart.com/crgp0603f100k-te+connectivity-91018719, RoHS=TRUE, Series=CRGP
R5 R6: library part CMP-2100-03664-2, "RES 10K OHM 1% 1/10W 0603", Case Code (Imperial)=0603, Case Code (Metric)=1608, Max Operating Temperature=155°C, Max Power Dissipation=100mW, Min Operating Temperature=-55°C, Resistance=10kR, Resistance Tolerance=1%, Resistor Type="Thick Film", Temperature Coefficient=100ppm/°C, Voltage Rating=75V, Voltage Rating (DC)=50V, Case/Package=0603, Construction=Rectangular, Depth=0.8mm, Features="Moisture Resistant", Height=0.45mm, Lead Free="Lead Free", Lead Pitch=0.3mm, Length=1.6mm, Military Standard=Not, Number of Pins=2, Number of Terminations=2, Packaging="Tape and Reel", Power Rating=100mW, RoHS Compliant=Yes, Series=RC, Size Code=0603, Termination=SMD/SMT, Tolerance=1%, Weight=7.1E-05oz, Width=0.8mm
R_LED: library part CMP-02407-000304-1, "RES SMD 100 OHM 1% 1/8W 0603", Case Code (Imperial)=0603, Case Code (Metric)=1608, Max Operating Temperature=155°C, Max Power Dissipation=125mW, Min Operating Temperature=-55°C, Package Quantity=1, Resistance=4.7kR, Temperature Coefficient=25ppm/°C, Tolerance=0.1%, Voltage Rating=75V, Case/Package=0603, Composition="Thin Film", Contact Plating=Tin, Depth=0.85mm, Features="Automotive AEC-Q200", Height=0.45mm, Length=1.55mm, Military Standard=Not, Number of Terminations=2, Packaging="Tape and Reel", Power Rating=125mW, Radiation Hardening=No, REACH SVHC="No SVHC", Voltage Rating (DC)=75V, Width=0.033inch
SW1: library part CMP-10038-000020-1, "SWITCH SLIDE SPST 4A 125V", Actuator Color=Black, Contact Current Rating=2A, Current Rating=4A, Max Operating Temperature=65°C, Max Voltage Rating (AC)=250V, Max Voltage Rating (DC)=125V, Min Operating Temperature=-30°C, Package Quantity=1, Voltage Rating (DC)=28V, Actuator Length=5.08mm, Actuator Material=Nylon, Actuator Type=Standard, Contact Material=Copper, Contact Plating=Silver, Depth=10.8mm, Electrical Life=10000Cycles, Housing Material=Nylon, Lead Free="Lead Free", Length=19.1mm, Max Current Rating=4A, Mount="Through Hole", Orientation=Straight, Packaging=Bulk, Radiation Hardening=No, RoHS Compliant=Yes, Series=L, Switch Function=On-Off, Switch Travel=3.81mm, Termination="PC Pins", Throw Configuration=SPST, Voltage Rating (AC)=125V
U1: library part CMP-09139-000487-1, "IC REG BUCK ADJUSTABLE 6A 24LQFN", RoHS Compliant=Yes

## Free pads (board coordinates)
  round 4 hole 2.7 unplated: 1(3.5,53) 1(61.5,3.5) 2(61.5,53) 3(3.5,3.5)

## Via types
v1: diameter 0.7, hole 0.3, Top Layer to Bottom Layer, 90 vias
v2: diameter 0.7, hole 0.3, Top Layer to Bottom Layer, tented top, 16 vias

## Nets (pads, with @x,y where several pads share a name; then routed paths per layer and width w, separated by ;. In a path a pad name is that pad's centre, name@x,y a point inside that pad or via, vN(x,y) a via of type N, cw(c..) or ccw(c..) an arc to the next point about the centre after c; other vN are vias at no path point)
GND: C1.2 CIN1.1 CIN2.2 CIN3.2 COPT1.2 COPT2.2 COUT1.2 CSS.2 D2.1 J1.2 J1.3 J2.4 J2.Shell J3.1 J3.2 J3.3 J3.4 J3.A1-B12 J3.B1-A12 J4.1 J4.2 J6.2 R2.2 R3.1 U1.3 U1.4 U1.15 U1.16 U1.22 U1.25 U1.26 U1.27 U1.28 | length 8.5
  Top Layer w0.15: R2.2 41.744,39.45 41.896,39.298 41.896,38.41 42.289,38.018 42.457,38.018 42.85,37.625 U1.22 ; U1.22@42.8,37.1 42.9,37.2 42.9,37.413 44.312,38.825 CSS.2
  Top Layer w0.25: J3.1@16.48,6.965 J3.1@16.48,7.515 ; J3.2@25.12,6.965 J3.2@25.12,7.515
  other v1: 15.4,3.335 26.2,3.335 15.4,7.5 26.2,7.515 29.2,8.225 44.563,8.225 28.3,9.1 45.625,9.325 17.4,10.5 24.4,10.523 17.4,11.7 25.5,12.3 17.4,13.1 27.3,14 19.8,14.675 21.55,14.675 17,16 23.2,16 12.7,17 30.8,17.2 24.6,17.7 32.209,18.879 3.7,19.5 7.3,19.5 34.3,20.9 35.513,20.9 49.996,21.088 39.9,21.1 40.7,21.1 41.5,21.1 42.35,21.1 43.1,21.1 43.899,21.1 44.7,21.1 45.6,21.1 46.5,21.1 47.4,21.1 49,21.1 50.873,21.1 51.7,21.1 54.6,21.1 29.7,22.6 1.6,22.9 60,24.4 7.3,24.5 9.05,24.5 10.9,24.5 15.18,24.9 32,25.1 5.88,25.6 60,26.2 34.5,27.6 60,28.3 37.2,28.769 52.605,29.661 60,30.619 48.75,30.9 51.7,31 1.6,32.8 52.605,33.6 57.423,33.6 10.1,34.1 12.1,34.1 19.4,34.487 52.605,34.793 3.7,35.4 7.023,35.4 52.605,36.151 57.423,36.4 54.6,36.963 19.4,37.2 56.023,37.6 31.2,37.7 33.4,37.7 36,37.7 54.6,38.9 24.323,39.1 25.123,39.1 25.923,39.1 24.323,39.9 25.123,39.9 25.923,39.9 57.423,40 24.3,40.7 25.123,40.7 25.923,40.7 56.023,41.433 54.6,43.035 41.85,44.6 41.85,46.9
  other v2: 42.122,34.193 42.714,34.193 43.47,34.193 44.062,34.193 42.122,34.793 42.714,34.801 43.464,34.793 44.062,34.793 42.122,35.498 42.714,35.498 43.47,35.498 44.062,35.498 42.122,36.098 42.714,36.098 43.47,36.098 44.062,36.098
NetCFF_2: CFF.2 R1.2 R2.1 U1.24 | length 12.5
  Top Layer w0.15: R2.1 41.744,42.961 40.2,41.417 40.2,38.2 40.9,37.5 41.762,37.5 41.8,37.462 41.8,37.1 U1.24 ; R2.1@41.744,43.046 42.198,43.5 CFF.2 R1.2@43.85,41.149 ; R1.2@43.875,41.1 R1.2
NetCSS_1: CSS.1 U1.21 | length 3.1
  Top Layer w0.15: U1.21@43.3,37.1 43.4,37.2 43.4,37.361 44.019,37.98 44.668,37.98 45.512,38.825 CSS.1
NetD1_2: D1.2 F1.2
NetD2_2: D2.2 R_LED.2
NetF1_1: F1.1 R_LED.1 SW1.2
NetF2_2: F2.2 J2.1
NetJ1_1: J1.1 J5.1 J5.2 SW1.1
NetJ3_A5: J3.A5 R5.2 | length 2.5
  Top Layer w0.3: J3.A5@19.55,8.09 19.55,9.85 19.8,10.1 R5.2
NetJ3_B5: J3.B5 R6.2 | length 2.8
  Top Layer w0.3: R6.2@21.7,10.523 21.777,10.523 22.55,9.75 J3.B5@22.55,8.09
NetL1_1: L1.1 U1.8 U1.9 U1.10 U1.11 U1.12
NetR3_2: R3.2 U1.18 | length 4.3
  Top Layer w0.25: U1.18@45.225,36.4 45.6,36.775 45.6,37.4 47.1,38.9 R3.2@48.15,38.9
NetR4_1: R4.1 U1.23 | length 2.4
  Top Layer w0.15: R4.1 41.223,38.269 41.616,37.876 41.784,37.876 42.3,37.361 42.3,37.1 U1.23
VIN_12V: C1.1 CIN1.2 CIN2.1 CIN3.1 COPT1.1 COPT2.1 D1.1 U1.5 U1.6 U1.13 U1.14 U1.17 | length 18.6
  Top Layer w0.635: COPT2.1 38.8,29.1 39.3,28.6 46.8,28.6 47.4,29.2 COPT1.1
VOUT_5V_6A: CFF.1 COUT1.1 F2.1 J3.A4-B9 J3.B4-A9 J6.1 L1.2 R1.1 R4.2 R5.1 R6.1 U1.1 | length 67.8
  Top Layer w0.15: R4.2 43.081,38.9 44.873,40.692 44.873,40.696 45.277,41.1 R1.1
  Top Layer w0.25: U1.1@41.197,36.41 40.972,36.41 39.4,37.982 39.4,45.554 39.546,45.7 49.528,45.7 51.728,43.5
  Top Layer w0.635: R1.1 48.4,41.1 54.128,41.1 ; CFF.1 51.728,43.5 54.128,41.1 ; 56,23.38 58.328,23.38 58.7,23.752 58.7,36.528 54.128,41.1
pads on no net: J2.2 J2.3 J3. J3.A6 J3.A7 J3.A8 J3.B6 J3.B7 J3.B8 U1.2 U1.7 U1.19 U1.20 U1.29 U1.30 U1.31 U1.32

## Polygon pours and split planes (outlines as drawn)
GND on Top Layer "GND_L01_P055" (solid, pour order 55): -1.7,59.3 -1.7,-2.9 -2,-3.2 -1.9,-3.3 69.5,-3.3 69.5,59.8
GND on Top Layer "GND_L01_P047" (solid, pour order 47): 42.7,36.41 42.712,36.423 42.712,37.5 43,37.5 43,36.49 43.089,36.41 44.347,36.41 44.347,35.59 45.35,35.59 45.35,34.747 44.347,34.747 44.347,33.899 44.336,33.91 41.847,33.91 41.847,34.747 40.453,34.747 40.1,35.1 30.7,35.1 30.7,38 36.25,38 37.55,36.7 39.8,36.7 40.9,35.6 41.847,35.6 41.847,36.41
NetF2_2 on Top Layer "NETF2_2_L01_P039" (solid, pour order 39): 37.3,19.7 38,19.7 38,20.7 36.4,20.7 32.45,16.75 32.45,13.227 33.587,13.227 33.587,15.987
NetD2_2 on Top Layer "NETD2_2_L01_P038" (solid, pour order 38): 15.8,16.497 15.8,16.5 15.9,16.6 15.9,17.197 16.994,18.291 16.994,19.244 16.94,19.297 16.294,19.297 16.241,19.244 16.241,18.639 15.2,17.597 15.078,17.472 15.078,16.597 15.178,16.497
NetF1_1 on Top Layer "NETF1_1_L01_P048" (solid, pour order 48): 17.762,22.9 17.899,22.764 17.9,22.764 17.9,20.711 17.788,20.6 15.8,20.6 15.7,20.5 15.7,18.3 15,18.3 15,20.5 14.9,20.6 14.4,20.6 9.6,15.8 7.6,15.8 7.4,16 7.4,18.3 7.7,18.6 8.774,18.6 12.611,22.9
NetD1_2 on Top Layer "NETD1_2_L01_P049" (solid, pour order 49): 12.375,29.4 12.4,29.4 12.7,29.7 19.89,29.7 27.2,23.015 27.2,20.2 27.1,20.1 23.012,20.1 23.012,22.438 18.25,27.2 12.5,27.2 12.375,27.325
VOUT_5V_6A on Top Layer "VOUT_5V_6A_L01_P054" (solid, pour order 54): 35.9,21.7 33.943,21.7 23.5,11.844 23.5,7.625 22.9,7.625 22.9,10.652 22.903,10.661 22.55,11.014 19.05,11.014 18.7,10.655 18.7,7.625 18.1,7.625 18.1,13.6 18.6,14.1 18.6,14.082 22.217,14.082 35.6,27.444 36.256,28.1 56.3,28.1 56.6,27.8 56.6,22.2 56.1,21.7 36,21.7
NetJ1_1 on Top Layer "NETJ1_1_L01_P052" (solid, pour order 52): 13.2,38.8 13.4,38.6 15.18,38.6 15.18,33.972 14.556,33.348 3.255,33.348 1.1,31.287 1.1,24.8 5.4,20.5 10.3,20.5 10.4,20.6 10.4,23 10.3,23.1 6.9,23.1 3.6,26.4 3.6,30.7 15.9,30.7 18.123,32.923 18.123,40.177 15.4,42.9 13.5,42.9 13.2,42.6
VIN_12V on Top Layer "VIN_12V_L01_P051" (solid, pour order 51): 23,34.5 23.4,34.9 40.1,34.9 40.4,34.6 41.6,34.6 41.6,33.7 40.2,32.3 27.569,32.3 27.1,31.831 27.1,27.4 27,27.3 23.2,27.3 23,27.5
GND on Top Layer "GND_L01_P037" (solid, pour order 37): 16.5,17.46 17.4,17.46 17.4,15.54 16.5,15.54
VIN_12V on Top Layer "VIN_12V_L01_P042" (solid, pour order 42): 44.6,33.8 45.063,33.337 51.873,33.337 51.873,36.199 44.6,36.199
GND on Top Layer "GND_L01_P053" (solid, pour order 53): 27.813,12.025 28.613,12.825 39.013,12.825 39.013,16.225 43.913,16.225 46.013,14.125 46.013,8.525 45.013,7.525 28.713,7.525 27.813,8.425
GND on Top Layer "GND_L01_P050" (solid, pour order 50): 26.2,8.7 26.6,8.3 26.6,2.7 26.2,2.3 15.3,2.3 14.8,2.8 14.8,8.2 15.3,8.7 17.91,8.7 17.91,7.615 17.215,7.615 17.1,7.5 17.1,6.71 17.91,5.9 23.69,5.9 24.29,6.5 24.3,6.5 24.3,7.5 24.185,7.615 23.69,7.615 23.69,8.69 23.7,8.7
NetL1_1 on Top Layer "NETL1_1_L01_P044" (solid, remove dead copper, pour order 44): 42.147,33.63 44.538,33.63 44.538,32.562 44.7,32.4 46.3,32.4 46.3,29.1 40.4,29.1 40.4,32.4 42.147,32.4
GND on Top Layer "GND_L01_P040" (solid, pour order 40): 49,39.6 52,39.6 52.2,39.4 52.2,36.5 46.5,36.5 46.5,37.8 48.4,37.8 49,38.4
GND on Top Layer "GND_L01_P041" (solid, pour order 41): 24,41 24,35.2 26.3,35.2 26.3,41
GND on Top Layer "GND_L01_P045" (solid, pour order 45): 56.5,31.3 57.4,30.4 57.4,29.2 56.5,28.3 48.3,28.3 48.3,31.3
GND on Top Layer "GND_L01_P046" (solid, pour order 46): 7,34.7 13.2,34.7 13.2,37 9.5,37 9.5,42.9 7,42.9
GND on Top Layer "GND_L01_P043" (solid, pour order 43): 3.8,27.312 11.5,27.312 11.5,30.012 3.8,30.012
GND on Bottom Layer "GND_L02_P056" (solid, pour order 56): -3.6,60.6 -1,60.6 69.2,60.6 69.2,-1.9 70.2,-2.9 -3.6,-2.9

## Silkscreen, mask and mechanical layers (free items; w line width, h text height)
Top Overlay:
  text "GPIO" at 29.727,46.527 h1.27
  text "Input" at 5.457,34.089 h0.5
  text "Output" at 53.327,32.594 h0.5
  text "12V" at 10.427,31.927 h0.5
  text "GND" at 56.627,29.627 h0.5
  text "GND" at 10.327,28.227 h0.5
  text "5V" at 56.827,26.927 h0.5
  text "Group 24 - Pi 5 Power Board" at 63.213,17.754 h1 r90
  text "CSI PORT" at 47.727,17.027 h1.27
  text "↑" at 14.2,13.9 h1.52
  text "ON" at 13.027,13.627 h0.5
  text "OFF" at 12.627,12.127 h0.5
  text "↓" at 14.2,12.1 h1.52
  text "5V/1A" at 43.827,5.327 h0.5
  text "5V/3A" at 12.127,4.727 h0.5
  text "USBA" at 44.026,4.427 h0.5
  text "USB C" at 12.127,3.827 h0.5